# Altium PCB SAMV71_Xplained_Ultra.PcbDoc (part 4 of 9)
Units mm, origin at the board's own origin, x right, y up, seen from the top; angles counter-clockwise.
Board outline 90 x 135 mm, 8 copper layers (Top Layer LF-Signals, Ground Plane 1 (GND), Power Plane (VCC), Ground Plane 2 (GND), Signal Layer 1, Signal Layer 2, Ground Plane 3 (GND), Bottom Layer LF-Signals), stack 1.632 mm thick; 483 components, 411 nets, 1994 pads, 1021 vias.
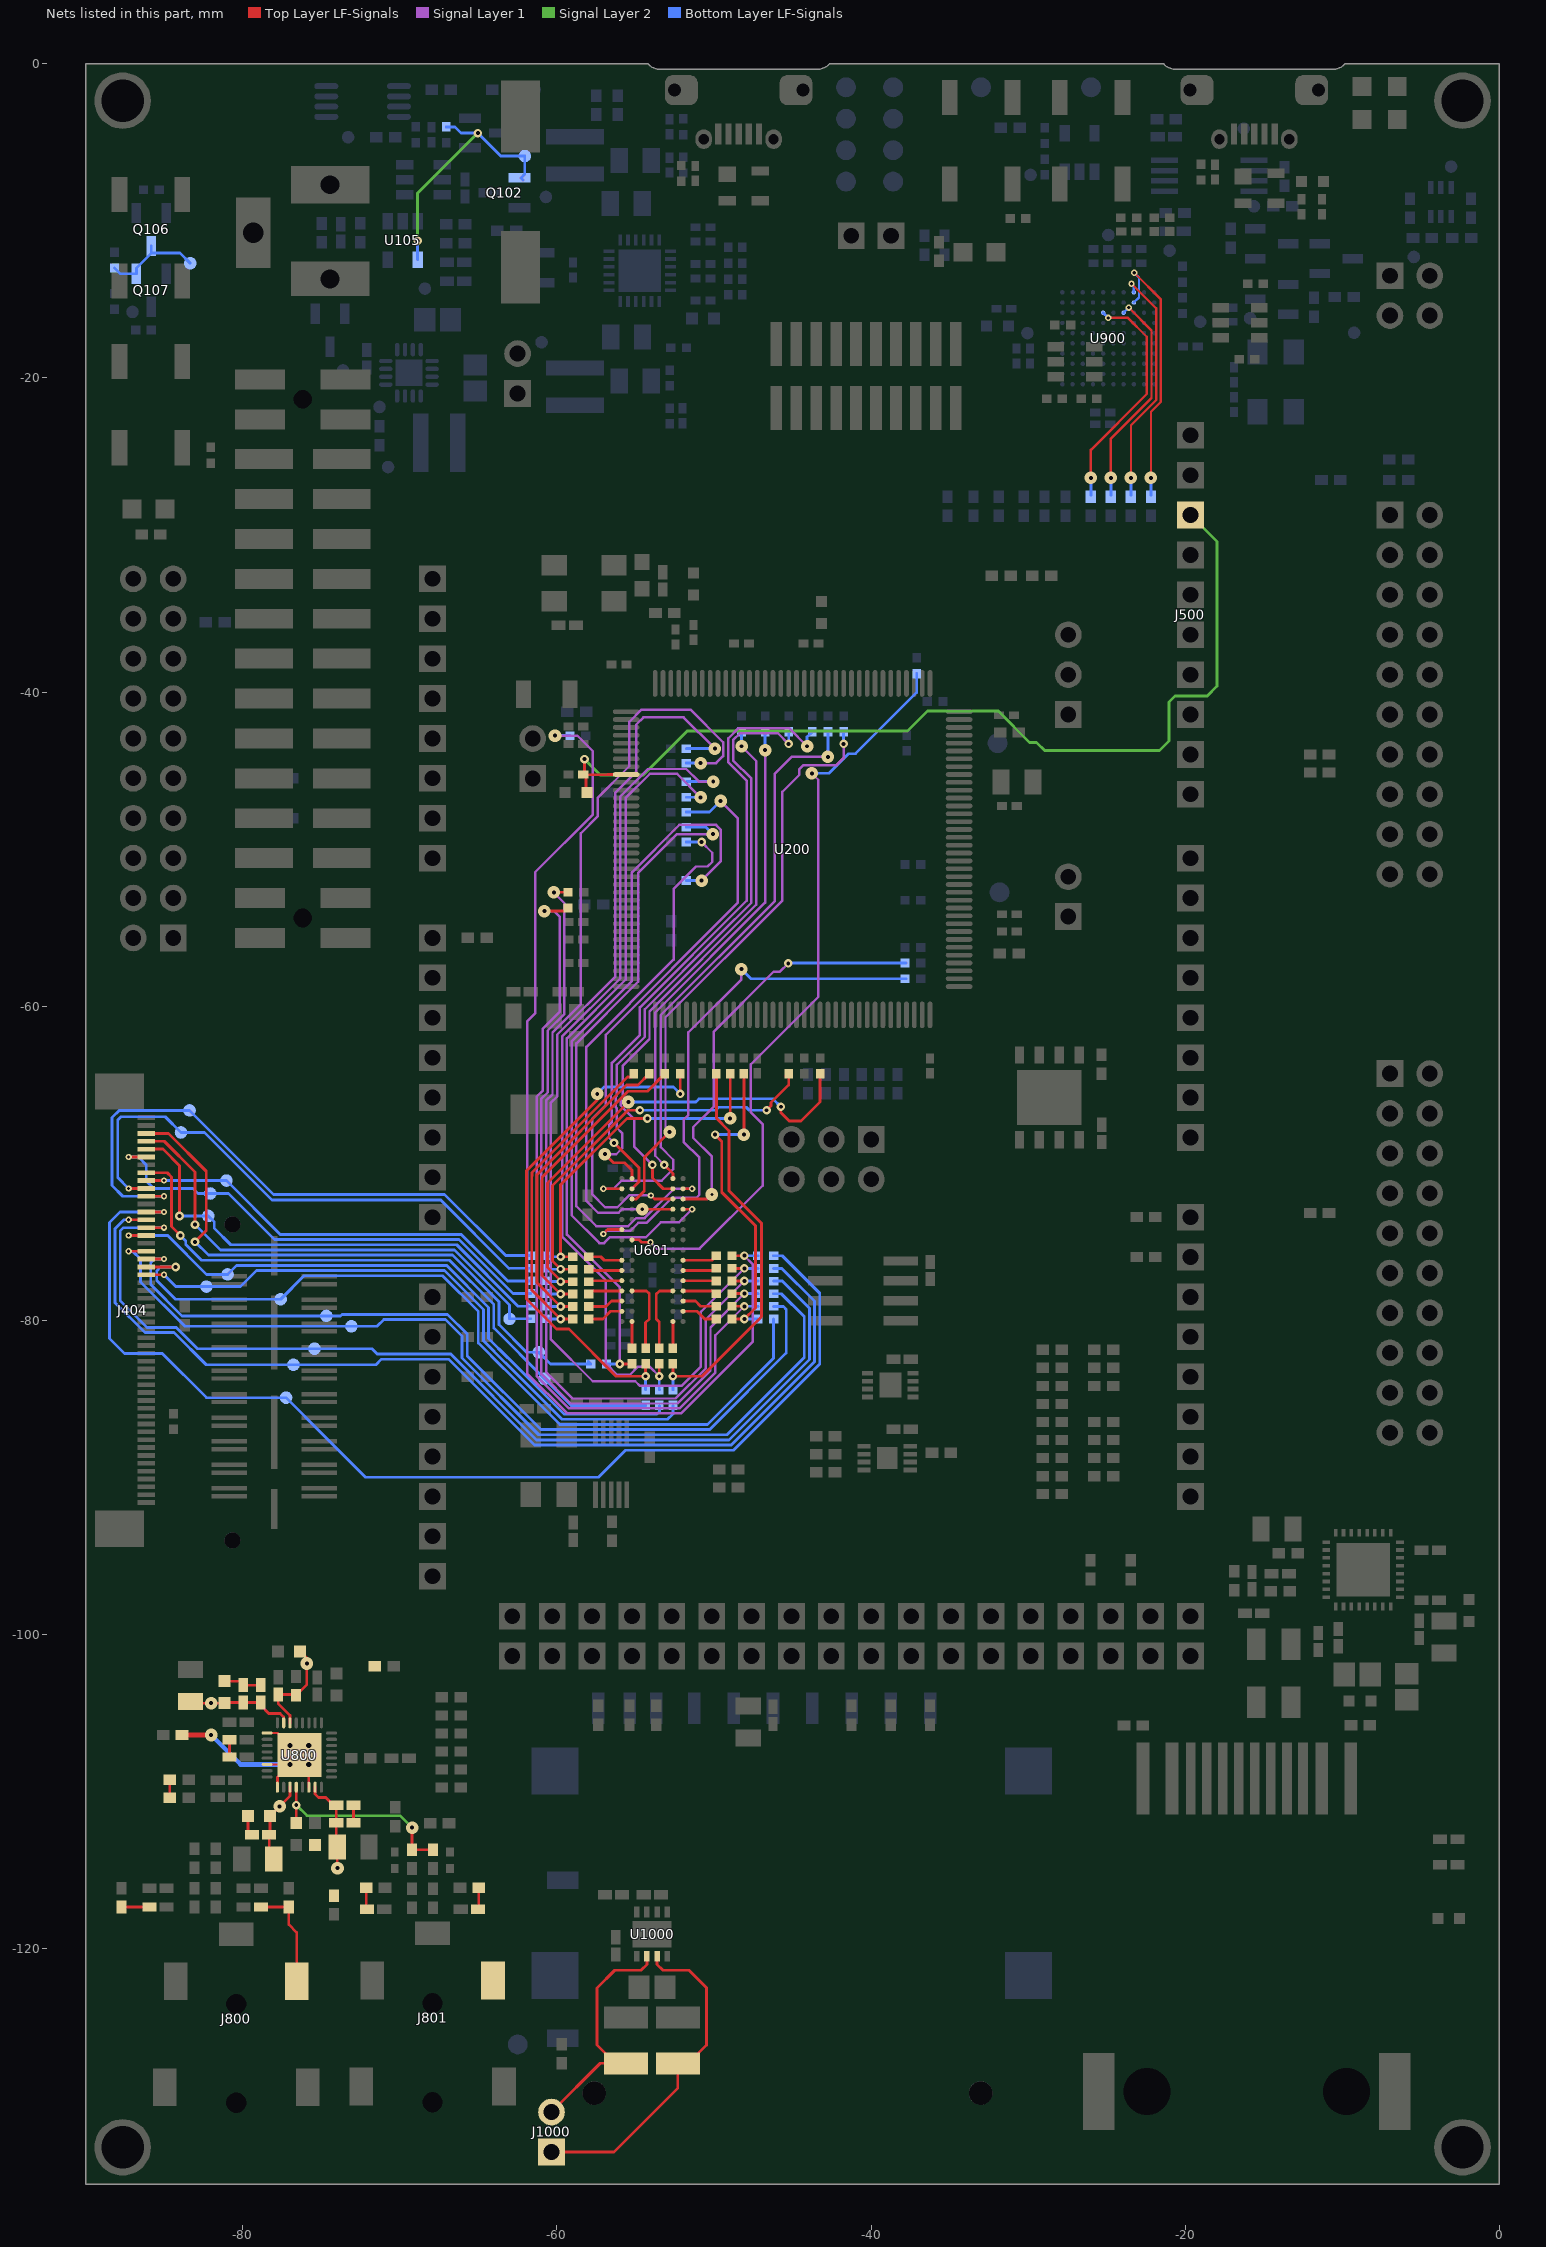
[diagram p9: the nets of this part, all layers, seen from the top]

## Via types
v1: diameter 0.55, hole 0.25, Top Layer LF-Signals to Bottom Layer LF-Signals, 546 vias
v2: diameter 0.55, hole 0.25, Top Layer LF-Signals to Bottom Layer LF-Signals, tented both sides, 190 vias
v3: diameter 0.55/0.55/0.55/0.8 (per signal layer), hole 0.25, Top Layer LF-Signals to Bottom Layer LF-Signals, tented top, 179 vias
v4: diameter 0.4, hole 0.2, Top Layer LF-Signals to Bottom Layer LF-Signals, 40 vias
v5: diameter 0.55, hole 0.25, Top Layer LF-Signals to Bottom Layer LF-Signals, tented top, 24 vias
v6: diameter 0.4, hole 0.2, Top Layer LF-Signals to Bottom Layer LF-Signals, tented both sides, 16 vias
v7: diameter 0.7, hole 0.35, Top Layer LF-Signals to Bottom Layer LF-Signals, 9 vias
v8: diameter 0.4/0.4/0.4/0.8 (per signal layer), hole 0.2, Top Layer LF-Signals to Bottom Layer LF-Signals, tented top, 6 vias
v9: diameter 0.4, hole 0.2, Top Layer LF-Signals to Bottom Layer LF-Signals, tented top, 5 vias
v10: diameter 0.66, hole 0.33, Top Layer LF-Signals to Bottom Layer LF-Signals, tented top, 4 vias
v11: diameter 0.55/0.55/0.55/0.8 (per signal layer), hole 0.25, Top Layer LF-Signals to Bottom Layer LF-Signals, 2 vias

## Nets (pads, with @x,y where several pads share a name; then routed paths per layer and width w, separated by ;. In a path a pad name is that pad's centre, name@x,y a point inside that pad or via, vN(x,y) a via of type N, cw(c..) or ccw(c..) an arc to the next point about the centre after c; other vN are vias at no path point) (continued)
D12: (continued)
  Bottom Layer LF-Signals w0.179: v1(-48.075,-78.301) -47.216,-78.301 R616.2@-47.21,-78.306
D12_LCD: J404.18 pad.670 R616.1 | length 58.2
  Top Layer LF-Signals w0.179: v4(-87.274,-75.6) J404.18@-86.15,-75.6
  Bottom Layer LF-Signals w0.179: v4(-87.274,-75.6) -87.012,-75.6 -86.51,-76.102 -86.51,-77.553 -83.684,-80.379 pad.670@-73.09,-80.379 -71.448,-80.379 -71.024,-79.954 -67.1,-79.954 -66.045,-81.009 -66.045,-82.397 -61.162,-87.281 -49.178,-87.281 -44.261,-82.363 -44.261,-79.764 -45.719,-78.306 R616.1@-46.21,-78.306
D13: R248.2 R615.2 R642.1 | length 52.4
  Top Layer LF-Signals w0.179: v3(-60.806,-53.943) -59.493,-53.943 R248.2@-59.3,-53.75 ; R642.1@-48.858,-79.106 v1(-48.075,-79.106)
  Signal Layer 1 w0.155: v3(-60.806,-53.943) -60.187,-53.943 -59.835,-54.295 -59.835,-60.365 -60.897,-61.428 -60.897,-65.359 -61.3,-65.761 -61.3,-83.548 -59.247,-85.602 -52.209,-85.602 -49.92,-83.313 -49.92,-80.951 v1(-48.075,-79.106)
  Bottom Layer LF-Signals w0.179: v1(-48.075,-79.106) -47.215,-79.106 R615.2@-47.21,-79.111
D13_LCD: J404.19 pad.671 R615.1 | length 54.3
  Top Layer LF-Signals w0.179: J404.19@-86.15,-76.1 v4(-85.026,-76.1)
  Bottom Layer LF-Signals w0.179: v4(-85.026,-76.1) -85.649,-76.1 -85.859,-76.31 -85.859,-77.738 -83.883,-79.715 pad.671@-74.687,-79.715 -73.782,-79.715 -73.692,-79.625 -66.964,-79.625 -65.716,-80.872 -65.716,-82.261 -61.026,-86.952 -50.279,-86.952 -45.41,-82.082 -45.41,-79.291 -45.589,-79.111 R615.1@-46.21,-79.111
D14: R249.2 R614.2 R643.1 | length 20.4
  Top Layer LF-Signals w0.179: v1(-49.934,-68.178) -49.508,-68.604 -49.508,-71.842 -47.37,-73.98 -47.37,-79.206 v1(-48.075,-79.911) R643.1@-48.858,-79.911 ; v3(-48.1,-68.178) R249.2@-48.1,-64.3
  Bottom Layer LF-Signals w0.179: v1(-49.934,-68.178) v3(-48.1,-68.178) ; v1(-48.075,-79.911) -47.215,-79.911 R614.2@-47.21,-79.916
D14_LCD: J404.20 pad.672 R614.1 | length 53.5
  Top Layer LF-Signals w0.179: J404.20@-86.15,-76.6 v1(-84.275,-76.6)
  Bottom Layer LF-Signals w0.179: v1(-84.275,-76.6) -85.234,-76.6 -85.485,-76.851 -85.485,-77.457 -84.284,-78.658 pad.672@-77.591,-78.658 -76.098,-77.165 -67.291,-77.165 -65.009,-79.447 -65.009,-81.437 -63.389,-83.057 -63.384,-83.057 -59.819,-86.623 -50.415,-86.623 -46.21,-82.418 R614.1@-46.21,-79.916
D15: R250.2 R613.2 R644.1 | length 25.5
  Top Layer LF-Signals w0.179: R644.1@-52.622,-82.777 v1(-52.622,-83.56) -50.765,-83.56 -46.976,-79.771 -46.976,-73.822 -49.05,-71.749 -49.05,-67.935 -49.85,-67.135 R250.2@-49.85,-64.3
  Bottom Layer LF-Signals w0.179: v1(-52.622,-83.56) -52.622,-84.411 R613.2@-52.617,-84.416
D15_LCD: J404.21 pad.674 R613.1 | length 40
  Top Layer LF-Signals w0.179: J404.21@-86.15,-77.1 v4(-85.026,-77.1)
  Bottom Layer LF-Signals w0.179: v4(-85.026,-77.1) -84.273,-77.853 pad.674@-82.325,-77.853 -80.153,-77.853 -79.135,-76.836 -67.154,-76.836 -64.68,-79.31 -64.68,-81.301 -63.27,-82.71 -63.266,-82.71 -59.682,-86.294 -52.956,-86.294 -52.617,-85.954 R613.1@-52.617,-85.416
DGI_GPIO0: R911.2 U900.F8 | length 15
  Top Layer LF-Signals w0.15: v3(-26.009,-26.368) -26.009,-24.584 -22.45,-21.025 -22.45,-17.375 -23.65,-16.175 v6(-24.9,-16.175)
  Bottom Layer LF-Signals w0.175: R911.2@-26.009,-27.468 v3(-26.009,-26.368) ; U900.F8@-25.225,-15.85 v6(-24.9,-16.175)
DGI_GPIO1: R912.2 U900.D8 | length 14.1
  Top Layer LF-Signals w0.15: v3(-24.734,-26.368) -24.734,-23.858 -22.15,-21.274 -22.15,-16.975 v6(-23.6,-15.525)
  Bottom Layer LF-Signals w0.15: U900.D8@-23.925,-15.85 v6(-23.6,-15.525)
  Bottom Layer LF-Signals w0.175: R912.2@-24.734,-27.468 v3(-24.734,-26.368)
DGI_GPIO2: R913.2 U900.C10 | length 15.4
  Top Layer LF-Signals w0.15: v3(-23.459,-26.368) -23.459,-23.008 -21.85,-21.399 -21.85,-15.575 v6(-23.425,-14)
  Bottom Layer LF-Signals w0.15: v6(-23.425,-14) -23.275,-14.15 U900.C10@-23.275,-14.55
  Bottom Layer LF-Signals w0.175: R913.2@-23.459,-27.468 v3(-23.459,-26.368)
DGI_GPIO3: R914.2 U900.C9 | length 17.3
  Top Layer LF-Signals w0.15: v6(-23.25,-13.3) -21.55,-15 -21.55,-21.523 -22.184,-22.157 v3(-22.184,-26.368)
  Bottom Layer LF-Signals w0.125: -22.95,-14.875 -22.95,-14.403
  Bottom Layer LF-Signals w0.15: U900.C9@-23.275,-15.2 -22.95,-14.875 ; v6(-23.25,-13.3) -22.95,-13.6 -22.95,-14.403
  Bottom Layer LF-Signals w0.175: R914.2@-22.184,-27.468 v3(-22.184,-26.368)
DQ0: R629.2 U601.A6 | length 1.7
  Top Layer LF-Signals w0.179: R629.2@-55.222,-81.777 U601.A6@-55.222,-80.075
DQ1: R630.2 U601.B7 | length 2.3
  Top Layer LF-Signals w0.179: R630.2@-57.986,-79.911 -57.069,-79.911 -56.583,-79.425 U601.B7@-55.872,-79.425
DQ2: R631.2 U601.C7 | length 2.3
  Top Layer LF-Signals w0.179: R631.2@-57.986,-79.119 -56.883,-79.119 -56.539,-78.775 U601.C7@-55.872,-78.775
DQ3: R632.2 U601.D7 | length 2.2
  Top Layer LF-Signals w0.179: R632.2@-57.986,-78.327 -57.784,-78.125 U601.D7@-55.872,-78.125
DQ4: R633.2 U601.D6 | length 4.7
  Top Layer LF-Signals w0.179: U601.D6@-55.222,-78.125 -54.302,-78.125 -54.12,-78.306 -54.12,-79.914 -54.355,-80.149 R633.2@-54.355,-81.777
DQ5: R634.2 U601.E7 | length 2
  Top Layer LF-Signals w0.179: R634.2@-57.827,-77.475 U601.E7@-55.872,-77.475
DQ6: R635.2 U601.F7 | length 1.9
  Top Layer LF-Signals w0.179: R635.2@-57.803,-76.825 U601.F7@-55.872,-76.825
DQ7: R636.2 U601.G7 | length 2.2
  Top Layer LF-Signals w0.179: R636.2@-57.986,-75.95 -57.218,-75.95 -56.993,-76.175 U601.G7@-55.872,-76.175
DQ8: R637.2 U601.G1 | length 2.2
  Top Layer LF-Signals w0.179: U601.G1@-51.972,-76.175 -50.148,-76.175 R637.2@-49.858,-75.885
DQ9: R638.2 U601.F1 | length 2
  Top Layer LF-Signals w0.179: U601.F1@-51.972,-76.825 R638.2@-49.993,-76.825
DQ10: R639.2 U601.E1 | length 2.1
  Top Layer LF-Signals w0.179: U601.E1@-51.972,-77.475 R639.2@-49.879,-77.475
DQ11: R640.2 U601.D2 | length 4.7
  Top Layer LF-Signals w0.179: R640.2@-53.489,-81.777 -53.489,-80.111 -53.682,-79.918 -53.682,-78.327 -53.48,-78.125 U601.D2@-52.622,-78.125
DQ12: R641.2 U601.D1 | length 1.9
  Top Layer LF-Signals w0.179: U601.D1@-51.972,-78.125 R641.2@-50.034,-78.125
DQ13: R642.2 U601.C1 | length 2.3
  Top Layer LF-Signals w0.179: U601.C1@-51.972,-78.775 -51.191,-78.775 -50.86,-79.106 R642.2@-49.858,-79.106
DQ14: R643.2 U601.B1 | length 2.3
  Top Layer LF-Signals w0.179: U601.B1@-51.972,-79.425 -51.077,-79.425 -50.591,-79.911 R643.2@-49.858,-79.911
DQ15: R644.2 U601.A2 | length 1.7
  Top Layer LF-Signals w0.179: R644.2@-52.622,-81.777 U601.A2@-52.622,-80.075
E\N\A\B\L\E\: pad.3@-83.35,-12.7 Q106.3 Q107.1 R131.2 | length 6.5
  Bottom Layer LF-Signals w0.175: R131.2@-88.175,-13 -87.8,-13.375 Q107.1@-86.775,-13.375 -86.775,-13 Q106.3@-85.825,-12.05 ; Q106.3@-85.825,-11.6 Q106.3@-85.825,-12.05 ; pad.3@-83.35,-12.7 -84,-12.05 Q106.3@-85.825,-12.05